# Altium PCB PCB_23GXSTM32F103Ext2.1ACTION_2026-02-23.pcbdoc (part 2 of 2)
Units mil, origin at the board's own origin, x right, y up, seen from the top; angles counter-clockwise.
Board outline 5147 x 5265.55 mil, 2 copper layers (Top Layer, Bottom Layer); 51 components, 82 nets, 368 pads, 74 vias.
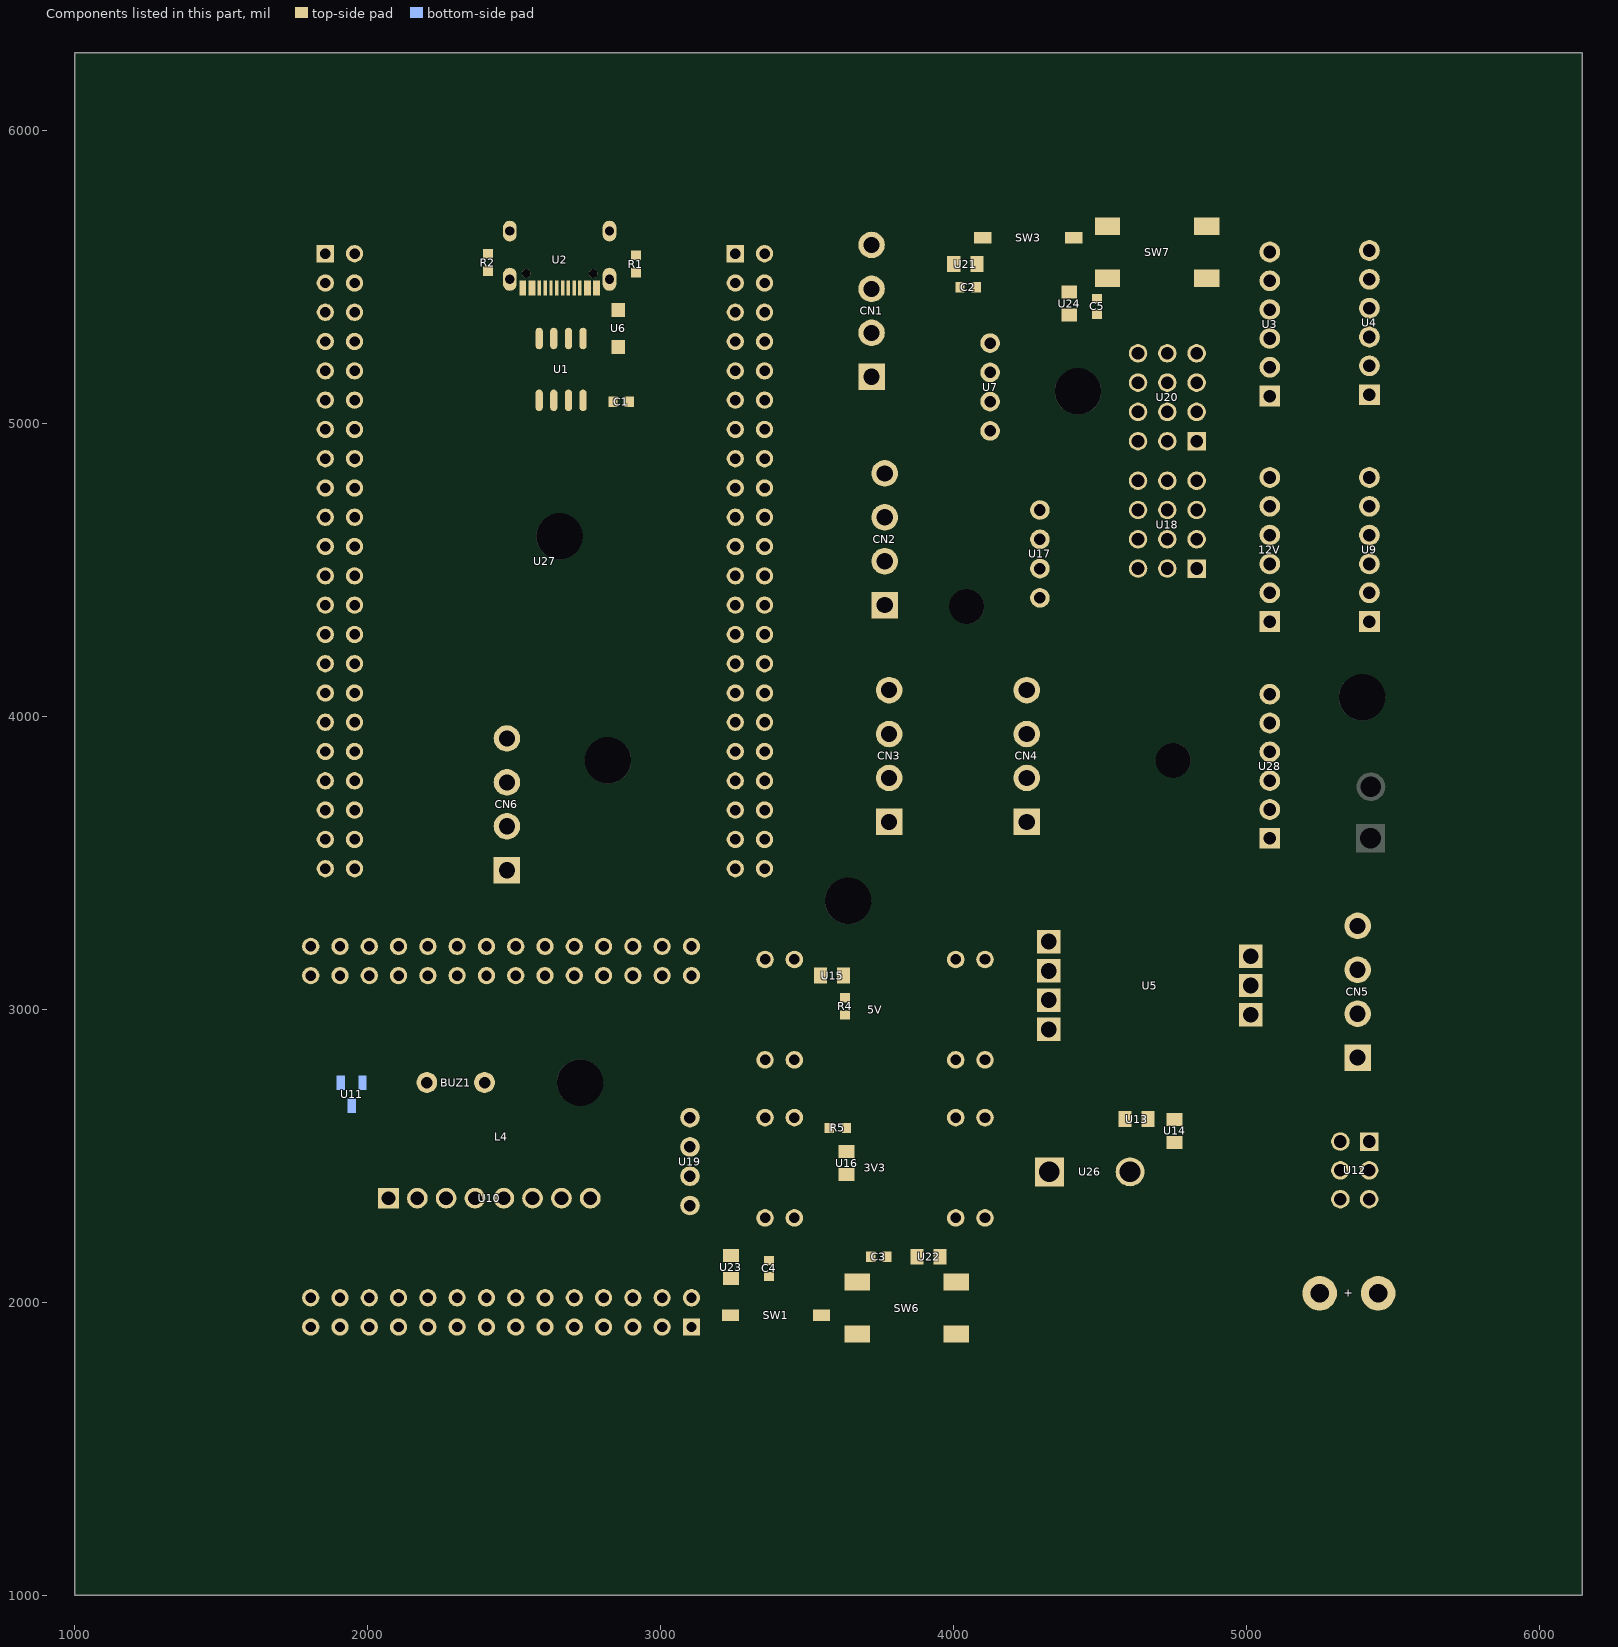
[diagram p2: the components of this part, seen from the top]

## Other copper
Top Layer:
  region net RX3: 2647.4,5103.7 2622.6,5103.7 2630,5118.7 2640,5118.7
  region net TX3: 2697.4,5055.08 2672.6,5055.08 2680,5040.08 2690,5040.08
  region net V3: 2747.4,5087.5 2747.4,5062.5 2762.4,5070 2762.4,5080
  region net D-: 2697.4,5314.92 2672.6,5314.92 2680,5329.92 2690,5329.92
  region net D+: 2747.4,5314.92 2722.6,5314.92 2730,5329.92 2740,5329.92
  region net 5V: 2597.4,5103.7 2572.6,5103.7 2580,5118.7 2590,5118.7
  region net 5V: 2572.6,5055.08 2572.6,5103.7 2535.1,5091.9 2535.1,5066.9
  region net 12V: 5374.62,3534.69 5374.62,3633.09 5299.62,3608.9 5299.62,3558.9
  region net 12V: 5473.02,3633.09 5473.02,3534.69 5548.02,3558.9 5548.02,3608.9
  region net 5V: 5334.7,2803.75 5334.7,2866.25 5297.2,2847.5 5297.2,2822.5
  region net 12V: 5044.54,5058.46 5044.54,5129.33 5021.1,5118.9 5021.1,5068.9
  region net 12V: 5115.41,5129.33 5115.41,5058.46 5190.41,5073.9 5190.41,5123.9
  region net 12V: 5384.54,5063.46 5384.54,5134.33 5309.54,5123.9 5309.54,5073.9
  region net 12V: 5044.54,4288.46 5044.54,4359.33 5036.1,4348.9 5036.1,4298.9
  region net 12V: 5115.41,4359.33 5115.41,4288.46 5190.41,4298.9 5190.41,4348.9
  region net 12V: 5455.41,4359.33 5455.41,4288.46 5530.41,4298.9 5530.41,4348.9
  region net 12V: 5384.54,4288.46 5384.54,4359.33 5309.54,4348.9 5309.54,4298.9
  region net OPG: 5055,2996.31 5055,2966.29 5073.01,2975.29 5073.01,2987.3
  region net OPTX: 5055,3096.31 5055,3066.29 5073.01,3075.29 5073.01,3087.3
  region net OPRX: 5055,3196.31 5055,3166.29 5073.01,3175.29 5073.01,3187.3
  region net 5V: 4365,3262.55 4365,3200.05 4383.7,3218.8 4383.7,3243.8
  region net CC2: 2427.01,5567.2 2427.01,5592.2 2442.01,5584.7 2442.01,5574.7
  region net CC1: 2897.99,5587.2 2897.99,5562.2 2882.99,5569.7 2882.99,5579.7
  region net 3V3: 3587.8,2612.01 3562.8,2612.01 3570.3,2614.7 3580.3,2614.7
  region net M3V3: 3647.26,2577.99 3622.26,2577.99 3629.82,2562.99 3639.82,2562.99
  region net M3V3: 3622.2,2612.01 3647.2,2612.01 3639.7,2627.01 3629.7,2627.01
  region net M5V: 3642.5,3055.53 3617.5,3055.53 3625,3070.53 3635,3070.53
  region net M5V: 3647.01,3027.2 3647.01,3052.2 3662.01,3044.7 3662.01,3034.7
  region net M5V: 3612.99,3052.2 3612.99,3027.2 3597.99,3034.7 3597.99,3044.7
  region net M3V3: 3647.42,2536.66 3622.42,2536.66 3629.86,2551.66 3639.86,2551.66
  region net M3V3: 3662.1,2501.9 3662.1,2526.9 3677.1,2519.4 3677.1,2509.4
  region net 5V: 3558.1,3142.11 3533.1,3142.11 3540.6,3154.4 3550.6,3154.4
  region net M5V: 3642.5,3087.89 3617.5,3087.89 3625,3072.89 3635,3072.89
  region net M12V: 4727.9,2636.9 4727.9,2611.9 4712.9,2619.4 4712.9,2629.4
  region net M12V: 4782.1,2611.9 4782.1,2636.9 4797.1,2629.4 4797.1,2619.4
  region net 12V: 4563.34,2637.5 4563.34,2612.5 4548.34,2620 4548.34,2630
  region net M12V: 4686.66,2636.9 4686.66,2611.9 4701.66,2619.4 4701.66,2629.4
  region net PC5V: 2560.51,5437 2548.7,5437 2549.6,5422 2559.6,5422
  region net PC5V: 2572.32,5437.01 2560.51,5437.01 2561.4,5422.01 2571.4,5422.01
  region net PC5V: 2749.49,5437 2737.68,5437 2738.6,5422 2748.6,5422
  region net PC5V: 2761.3,5437.01 2749.49,5437.01 2750.4,5422.01 2760.4,5422.01
  region net CC2: 2580.2,5488.18 2592.01,5488.18 2591.1,5503.18 2581.1,5503.18
  region net D+: 2619.57,5488.18 2631.38,5488.18 2630.5,5503.18 2620.5,5503.18
  region net D-: 2651.06,5437 2639.25,5437 2640.2,5422 2650.2,5422
  region net D+: 2658.94,5488.18 2670.75,5488.18 2669.8,5503.18 2659.8,5503.18
  region net D+: 2670.75,5437 2658.94,5437 2659.8,5422 2669.8,5422
  region net D-: 2690.43,5437 2678.62,5437 2679.5,5422 2689.5,5422
  region net CC1: 2698.31,5488.18 2710.12,5488.18 2709.2,5503.18 2699.2,5503.18
  region net 5V: 2035.08,2342.5 2035.08,2367.5 2020.08,2360 2020.08,2350
  region net V3: 2821.69,5062.5 2821.69,5087.5 2806.69,5080 2806.69,5070
  region net 3V3VDE1: 4417.69,5654.69 4440.04,5654.69 4452.27,5669.69 4438.12,5669.69
  region net 3V3VDE1: 4380.99,5654.69 4402.81,5654.69 4382.39,5669.69 4368.24,5669.69
  region net S$51075: 4092.3,5615.31 4086.44,5614.88 4085.14,5615.31 4069.96,5615.31 4075.83,5618.42 4085.14,5615.31 4092.3,5615.31
  region net S$50933: 4472.29,5431.12 4494.12,5443.31 4474.9,5449.76 4465.83,5444.7
  region net S$50933: 4477.5,5443.31 4502.5,5443.31 4495,5458.31 4485,5458.31
  region net C4: 4367.9,5383.1 4367.9,5358.1 4352.9,5365.6 4352.9,5375.6
  region net S$50933: 4422.1,5461.9 4422.1,5436.9 4437.1,5444.4 4437.1,5454.4
  region net S$51055: 3352.29,2071.69 3352.29,2093.1 3337.29,2085.6 3337.29,2075.6
  region net C1: 3252.5,2181.66 3227.5,2181.66 3235,2196.66 3245,2196.66
  region net S$51055: 3252.5,2058.34 3227.5,2058.34 3235,2043.34 3245,2043.34
  region net S$51055: 3267.1,2093.1 3267.1,2068.1 3282.1,2075.6 3282.1,2085.6
  region net S$51065: 3785.1,2137.28 3760.1,2137.28 3767.6,2122.28 3777.6,2122.28
  region net S$51065: 3788.31,2167.5 3788.31,2142.5 3803.31,2150 3803.31,2160
  region net C0: 3966.9,2182.11 3941.9,2182.11 3949.4,2197.11 3959.4,2197.11
  region net S$51065: 3853.34,2142.5 3853.34,2167.5 3838.34,2160 3838.34,2150
  region net S$51075: 4065.06,5482.72 4090.06,5482.72 4082.56,5497.72 4072.56,5497.72
  region net C5: 3978.34,5547.5 3978.34,5522.5 3963.34,5530 3963.34,5540
  region net S$51075: 4066.87,5572.11 4091.87,5572.11 4084.37,5587.11 4074.37,5587.11
  region net S$51075: 4090.06,5517.89 4065.06,5517.89 4072.56,5502.89 4082.56,5502.89
  region net 3V3: 3578.75,1935.1 3556.4,1935.1 3576.83,1920.1 3590.97,1920.1
  region net 3V3: 3519.7,1974.47 3578.75,1974.47 3561.7,2011.97 3536.7,2011.97
  region net 3V3: 3519.7,1935.1 3519.7,1974.47 3482.2,1967.3 3482.2,1942.3
  region net S$51055: 3227.5,1974.47 3252.5,1974.47 3245,1989.47 3235,1989.47
  region net 5V: 2867.5,5238.39 2842.5,5238.39 2850,5223.39 2860,5223.39
  region net PC5V: 2831.38,5375.5 2831.38,5400.5 2816.38,5393 2816.38,5383
  region net 12V: 4278,2494.2 4376.4,2494.2 4352.2,2557.8 4302.2,2557.8
  region net 12V: 4376.4,2457.5 4376.4,2432.5 4391.4,2440 4391.4,2450
  region net 5V: 1884.32,5609.74 1884.32,5550.68 1921.82,5567.7 1921.82,5592.7
  region net 12V: 5115.41,3619.33 5115.41,3548.46 5190.41,3558.9 5190.41,3608.9
  region net 12V: 5115.41,3548.46 5044.54,3548.46 5055,3473.46 5105,3473.46
  region net 3V3: 3627.4,1878.9 3627.4,1903.9 3612.6,1896.4 3612.6,1886.4
  region net S$51065: 3714.01,2081.1 3714.01,2056.1 3729.01,2063.6 3729.01,2073.6
  region net 3V3VDE1: 4482.4,5661.1 4482.4,5686.1 4467.4,5678.6 4467.4,5668.6
  region net S$50933: 4508.69,5466.89 4483.69,5466.89 4486.46,5464.24 4497.07,5460.7
  region net TX1: 2050.24,3307.71 2037.29,3294.76 2046.27,3291.66 2053.34,3298.73
  region net TX1: 2038.82,3319.12 2025.88,3306.18 2022.77,3315.15 2029.85,3322.23
  region net RX1: 2012.18,3295.76 1999.24,3282.82 2008.21,3279.71 2015.29,3286.79
  region net RX1: 1990.85,3303.07 2009.15,3303.07 2005,3311.62 1995,3311.62
  region net C13: 4569.56,4066.96 4569.56,4085.26 4561.02,4081.11 4561.02,4071.11
  region net E3: 3561.93,3545.85 3561.93,3564.15 3553.38,3560 3553.38,3550
  region net E2: 3516.93,3520.85 3516.93,3539.15 3510,3535 3510,3525
  region net C13: 4340.85,3878.07 4359.15,3878.07 4355,3886.62 4345,3886.62
  region net D15: 4536,3532.06 4554,3532.06 4550,3523.66 4540,3523.66
  region net D14: 4496,3532.06 4514,3532.06 4510,3523.66 4500,3523.66
  region net D13: 4456,3532.06 4474,3532.06 4470,3523.66 4460,3523.66
  region net D12: 4413.14,3538.14 4428.33,3528.47 4420.54,3523.47 4411.9,3528.97
  region net SDA1: 3047.06,4266 3047.06,4284 3038.66,4280 3038.66,4270
  region net SDA1: 2996,4037.94 3014,4037.94 3010,4046.34 3000,4046.34
  region net SCL1: 3031,4007.94 3049,4007.94 3045,4016.34 3035,4016.34
  region net SCL1: 3476,4282.06 3494,4282.06 3490,4273.66 3480,4273.66
  region net C4: 3421,5277.94 3439,5277.94 3435,5286.34 3425,5286.34
  region net RX4: 3189.14,4500.47 3206.12,4494.51 3205.65,4503.58 3195.18,4507.25
  region net TX4: 3186,4547.94 3204,4547.94 3200,4556.34 3190,4556.34
  region net SCL3: 3582.06,5086 3582.06,5104 3573.66,5100 3573.66,5090
  region net SDA3: 3582.06,5121 3582.06,5139 3573.66,5135 3573.66,5125
  region net C5: 3176.14,4390.31 3159,4384.8 3160,4393.95 3170,4397.16
  region net C5: 3177.94,4371 3177.94,4389 3186.34,4385 3186.34,4375
  region net C5: 3170.75,4368.02 3158.02,4380.75 3154.91,4371.98 3161.98,4364.91
  region net M5V: 3266,2272.94 3284,2272.94 3280,2281.34 3270,2281.34
  region net M3V3: 3301,2237.94 3319,2237.94 3315,2246.34 3305,2246.34
  region net C0: 3206.98,2970.75 3194.25,2958.02 3203.02,2954.91 3210.09,2961.98
  region net C1: 3146.98,2985.75 3134.25,2973.02 3143.02,2969.91 3150.09,2976.98
  region net C0: 3277.06,2936 3277.06,2954 3268.66,2950 3268.66,2940
  region net C0: 3607.94,2261 3607.94,2279 3616.34,2275 3616.34,2265
  region net E4: 4956,4272.06 4974,4272.06 4970,4263.66 4960,4263.66
  region net E5: 4926,4272.06 4944,4272.06 4940,4263.66 4930,4263.66
  region net E6: 4886,4272.06 4904,4272.06 4900,4263.66 4890,4263.66
  region net RX1: 3796,3102.94 3814,3102.94 3810,3111.34 3800,3111.34
  region net TX1: 3821,3077.94 3839,3077.94 3835,3086.34 3825,3086.34
  region net TNSS: 3161,3202.06 3179,3202.06 3175,3193.66 3165,3193.66
  region net TSCK: 3046,3242.06 3064,3242.06 3060,3233.66 3050,3233.66
  region net TMISO: 2946,3242.06 2964,3242.06 2960,3233.66 2950,3233.66
  region net TMOSI: 2846,3242.06 2864,3242.06 2860,3233.66 2850,3233.66
  region net TMISO: 2982.06,2111 2982.06,2129 2973.66,2125 2973.66,2115
  region net TSCK: 2992.06,2186 2992.06,2204 2983.66,2200 2983.66,2190
  region net TNSS: 2991,2232.94 3009,2232.94 3005,2241.34 2995,2241.34
  region net TMOSI: 2867.94,2111 2867.94,2129 2875,2125 2875,2115
  region net TMOSI: 2851,2027.06 2869,2027.06 2865,2018.66 2855,2018.66
  region net M12V: 3472.94,1836 3472.94,1854 3481.34,1850 3481.34,1840
  region net C4: 2647.94,4321 2647.94,4339 2656.34,4335 2656.34,4325
  region net C5: 2637.94,4351 2637.94,4369 2646.34,4365 2646.34,4355
  region net C0: 2285.31,3523.86 2279.8,3541 2288.95,3540 2292.16,3530
  region net C1: 2215.31,3571.14 2209.8,3554 2218.95,3555 2222.16,3565
  region net C5: 3156,5177.94 3174,5177.94 3170,5186.34 3160,5186.34
  region net C5: 3156,4952.06 3174,4952.06 3170,4943.66 3160,4943.66
  region net SCL3: 3217.94,4821 3217.94,4839 3226.34,4835 3226.34,4825
  region net SDA3: 3207.94,4916 3207.94,4934 3216.34,4930 3216.34,4920
  region net PC5V: 2738.61,5403.78 2755.17,5410.83 2748.6,5417.16 2738.6,5412.9
  region net PC5V: 2744.13,5410.47 2761.12,5404.52 2760.4,5413.67 2750.4,5417.17
  region net PC5V: 2761.98,5400.75 2749.25,5388.02 2758.02,5384.91 2765.09,5391.98
  region net PC5V: 2565.75,5421.98 2553.02,5409.25 2551.06,5416.86 2558.14,5423.94
  region net PC5V: 2574.65,5417.14 2556.71,5418.68 2561.4,5426.71 2571.4,5425.85
  region net L4NSS1: 2036,2702.06 2054,2702.06 2050,2693.66 2040,2693.66
  region net D-: 2633.99,5415.39 2651.06,5409.66 2650.2,5418.81 2640.2,5422.17
  region net D-: 2631,5397.06 2649,5397.06 2645,5388.66 2635,5388.66
  region net D-: 2695.75,5416.98 2683.02,5404.25 2680.97,5411.97 2688.04,5419.04
  region net B14: 4647.27,5266.34 4601.71,5253.84 4613.1,5279.83 4624.2,5282.87
  region net 5V: 4753.62,5260.83 4706.38,5260.83 4717.5,5282.88 4742.5,5282.88
  region net 5V: 4753.62,5219.17 4706.38,5219.17 4717.5,5197.12 4742.5,5197.12
  region net B13: 4598.57,5138.03 4631.97,5171.43 4603.21,5173.86 4596.14,5166.79
  region net 5V: 4753.62,5119.17 4706.38,5119.17 4717.5,5097.12 4742.5,5097.12
  region net 5V: 4753.62,5160.83 4706.38,5160.83 4717.5,5182.88 4742.5,5182.88
  region net B0: 4598.57,5041.97 4631.97,5008.57 4603.54,5006.46 4596.46,5013.54
  region net 5V: 4753.62,5019.17 4706.38,5019.17 4717.5,4997.12 4742.5,4997.12
  region net 5V: 4753.62,5060.83 4706.38,5060.83 4717.5,5082.88 4742.5,5082.88
  region net B1: 4612.06,4914.11 4606.56,4961.03 4586.83,4940 4588,4930
  region net 5V: 4753.62,4919.17 4706.38,4919.17 4717.5,4897.12 4742.5,4897.12
  region net 5V: 4753.62,4960.83 4706.38,4960.83 4717.5,4982.88 4742.5,4982.88
  region net L4SDA1: 3080.75,2602.62 3075.24,2652.52 3054.16,2630 3055.27,2620
  region net L4SCL1: 3077.87,2504.9 3077.87,2555.1 3060,2535 3060,2525
  region net 5V: 4753.62,4784.17 4706.38,4784.17 4717.5,4762.12 4742.5,4762.12
  region net 5V: 4753.62,4825.83 4706.38,4825.83 4717.5,4847.88 4742.5,4847.88
  region net 5V: 4753.62,4684.17 4706.38,4684.17 4717.5,4662.12 4742.5,4662.12
  region net 5V: 4753.62,4725.83 4706.38,4725.83 4717.5,4747.88 4742.5,4747.88
  region net 5V: 4753.62,4584.17 4706.38,4584.17 4717.5,4562.12 4742.5,4562.12
  region net 5V: 4753.62,4625.83 4706.38,4625.83 4717.5,4647.88 4742.5,4647.88
  region net 5V: 4753.62,4525.83 4706.38,4525.83 4717.5,4547.88 4742.5,4547.88
  region net 5V: 4753.62,4484.17 4706.38,4484.17 4717.5,4462.12 4742.5,4462.12
  region net OPRX: 5350.05,3251.04 5350.05,3318.96 5320,3291 5320,3279
  region net OPTX: 5352.91,3098.73 5347.4,3166.42 5318.07,3136 5319.05,3124
  region net OPG: 5352.15,2949.31 5348.07,3017.1 5318.11,2987.3 5318.83,2975.29
  region net 5V: 4220.05,3756.04 4220.05,3823.96 4188.36,3802.5 4188.36,3777.5
  region net 5V: 3809.95,3756.04 3809.95,3823.96 3841.64,3802.5 3841.64,3777.5
  region net 5V: 3750.05,3756.04 3750.05,3823.96 3718.36,3802.5 3718.36,3777.5
  region net TX4: 3735.05,4796.04 3735.05,4863.96 3710,4835 3710,4825
  region net RX4: 3735.05,4646.04 3735.05,4713.96 3703.36,4685 3703.36,4675
  region net 5V: 3735.05,4496.04 3735.05,4563.96 3703.36,4542.5 3703.36,4517.5
  region net 5V: 3794.95,4496.04 3794.95,4563.96 3826.64,4542.5 3826.64,4517.5
  region net 5V: 3749.95,5276.04 3749.95,5343.96 3781.64,5322.5 3781.64,5297.5
  region net 12VI: 5210.94,1985.71 5210.94,2074.29 5169.6,2055 5169.6,2005
  region net 5V: 4147.13,5049.9 4147.13,5100.1 4170.56,5087.5 4170.56,5062.5
  region net 5V: 4102.87,5049.9 4102.87,5100.1 4079.44,5087.5 4079.44,5062.5
  region net M3V3: 5303.82,2325.03 5296.59,2371.72 5277.64,2350 5279.19,2340
  region net M5V: 5299.96,2426.38 5299.96,2473.62 5277.91,2455 5277.91,2445
  region net M12V: 5342.56,2525.66 5340.66,2572.86 5359.8,2555 5360.2,2545
  region net M12V: 5299.33,2571.47 5346.34,2566.83 5330,2590.6 5320,2591.59
  region net L4NSS1: 2636.49,2329.47 2689.46,2333.81 2670,2307.33 2660,2306.51
  region net DRDY: 2589.22,2378.44 2536.07,2378.44 2557.64,2403.24 2567.64,2403.24
  region net L4MISO1: 2490.78,2331.56 2437.63,2331.57 2459.2,2306.76 2469.2,2306.76
  region net L4MOSI1: 2392.15,2378.68 2339,2378.19 2360.35,2403.19 2370.35,2403.28
  region net L4SCK1: 2242.11,2330.14 2295.18,2333.05 2275,2307.11 2265,2306.56
  region net 5V: 4317.13,4479.9 4317.13,4530.1 4340.56,4517.5 4340.56,4492.5
  region net 5V: 4272.87,4479.9 4272.87,4530.1 4249.44,4517.5 4249.44,4492.5
  region net 12V: 4127.34,2652.66 4127.3,2607.66 4148.3,2605.14 4148.35,2655.14
  region net 12V: 4087.65,2652.69 4087.63,2607.69 4066.63,2605.2 4066.65,2655.2
  region net 12V: 4027.33,2607.7 4027.32,2652.7 4048.32,2655.2 4048.33,2605.2
  region net 12V: 3987.64,2652.7 3987.63,2607.7 3966.63,2605.2 3966.64,2655.2
  region net 3V3: 3436.46,2652.7 3436.45,2607.7 3415.45,2617.7 3415.46,2642.7
  region net 3V3: 3476.15,2607.7 3476.14,2652.7 3497.14,2635.2 3497.14,2625.2
  region net 3V3: 3478.8,2610.35 3433.8,2610.35 3443.8,2589.35 3468.8,2589.35
  region net 3V3: 3376.14,2607.7 3376.14,2652.7 3397.14,2642.7 3397.14,2617.7
  region net 12V: 4127.33,3147.69 4127.31,3192.69 4148.31,3195.2 4148.34,3145.2
  region net 12V: 4087.64,3192.69 4087.63,3147.69 4066.63,3145.19 4066.64,3195.19
  region net 12V: 3987.72,3147.62 3987.56,3192.62 3966.55,3195.04 3966.73,3145.04
  region net 12V: 4027.32,3147.69 4027.32,3192.69 4048.32,3195.19 4048.32,3145.19
  region net 5V: 3436.46,3192.7 3436.45,3147.7 3415.45,3157.7 3415.46,3182.7
  region net 5V: 3476.15,3147.7 3476.14,3192.7 3497.14,3175.2 3497.14,3165.2
  region net 5V: 3376.14,3147.7 3376.14,3192.7 3397.14,3182.7 3397.14,3157.7
  region net 12VI: 4566.98,2411.25 4640.76,2413.68 4630,2378.86 4580,2377.21
  region net E2: 3374.32,3458.06 3374.32,3502.36 3394.99,3485.21 3394.99,3475.21
  region net E3: 3283.09,3488.62 3242.9,3507.24 3266.85,3518.93 3276.52,3514.45
  region net E4: 3374.32,3558.06 3374.32,3602.36 3394.99,3585.21 3394.99,3575.21
  region net E5: 3283.75,3585.98 3245.45,3608.22 3270.5,3617.57 3279.45,3612.38
  region net E6: 3374.32,3658.06 3374.32,3702.36 3394.99,3685.21 3394.99,3675.21
  region net C0: 3335.36,3757.97 3379.28,3763.71 3365,3741 3355,3739.7
  region net C1: 3238.29,3755.72 3232.55,3799.64 3214.28,3780 3215.58,3770
  region net C4: 3377.04,4360.8 3332.75,4360.56 3350,4339.98 3360,4340.04
  region net C5: 3235.38,4357.96 3235.14,4402.25 3214.56,4385 3214.62,4375
  region net B0: 3382.16,4491.28 3340.38,4505.98 3362.9,4519.97 3373.36,4516.29
  region net B1: 3283.03,4471.57 3242.69,4453.27 3266.53,4441.39 3276.26,4445.81
  region net TX3: 3235.38,4957.96 3235.14,5002.25 3214.56,4985 3214.62,4975
  region net RX3: 3377.02,5099.64 3332.73,5099.84 3349.97,5120.43 3359.97,5120.39
  region net B13: 3374.32,5158.06 3374.32,5202.36 3394.99,5185.21 3394.99,5175.21
  region net B14: 3252.94,5209.68 3284.26,5178.36 3286.75,5205.1 3279.68,5212.17
  region net 3V3VDE1: 3376.98,5599.69 3332.69,5599.8 3349.89,5620.42 3359.89,5620.4
  region net TX1: 1983.47,4587.21 1958.15,4550.87 1984.87,4553.06 1990.68,4561.39
  region net RX1: 1882.07,4568.91 1840.17,4554.56 1862.55,4540.38 1873.09,4543.98
  region net D15: 1974.32,4858.06 1974.32,4902.36 1994.99,4885.21 1994.99,4875.21
  region net D13: 1981.73,4992.31 1963.43,4951.97 1989.19,4958.74 1993.61,4968.47
  region net D14: 1883.03,4971.57 1842.69,4953.27 1866.53,4941.39 1876.26,4945.81
  region net D12: 1884.13,5076.85 1847.79,5051.53 1873.61,5044.32 1881.94,5050.13
  region net 3V3: 1935.26,5458.06 1935.26,5502.36 1914.59,5492.71 1914.59,5467.71
  region net 3V3: 1835.32,5458.01 1835.19,5502.3 1814.55,5492.59 1814.63,5467.59
  region net 3V3: 1874.32,5458.06 1874.32,5502.36 1894.99,5492.71 1894.99,5467.71
  region net 5V: 1974.38,5602.31 1974.27,5558.02 1994.96,5567.61 1995.02,5592.61
  region net 5V: 1935.26,5558.06 1935.25,5602.35 1914.59,5592.7 1914.59,5567.7
  region net 5V: 1827.15,2034.53 1782.85,2034.53 1800,2055.2 1810,2055.2
  region net 3V3: 1875.53,2016.85 1906.85,1985.53 1885.41,1977.74 1867.74,1995.41
  region net 3V3: 1927.91,2033.63 1920.62,1989.94 1932.92,1997.5 1937.08,2022.5
  region net L4SCK1: 2027.15,2034.53 1982.85,2034.53 2000,2055.2 2010,2055.2
  region net L4SDA1: 2624.53,1892.85 2624.53,1937.15 2635,1920 2635,1910
  region net L4SCL1: 2727.15,2034.53 2682.85,2034.53 2700,2045 2710,2045
  region net TMOSI: 2885.47,1892.85 2885.47,1937.15 2875,1920 2875,1910
  region net L4MISO1: 1931.94,3227.1 1913.64,3186.76 1939.4,3193.53 1943.82,3203.26
  region net L4MOSI1: 2027.15,3095.47 1982.85,3095.47 2000,3074.8 2010,3074.8
  region net DRDY: 2024.53,3192.85 2024.53,3237.15 2040,3220 2040,3210
Mid-Layer 2:
  region net C5: 2127.15,3234.53 2082.85,3234.53 2100,3255.2 2110,3255.2
  region net C4: 2124.53,3092.85 2124.53,3137.15 2140,3120 2140,3110
  region net TNSS: 3127.15,2034.53 3082.85,2034.53 3100,2055.2 3110,2055.2
  region net TSCK: 3030.65,1900.38 3016.3,1942.28 3041.23,1933.3 3044.83,1922.76
  region net TMISO: 3027.15,2034.53 2982.85,2034.53 3000,2055.2 3010,2055.2
  region net M12V: 2227.15,1895.47 2182.85,1895.47 2200,1874.8 2210,1874.8
  region net SCL1: 4272.87,4579.9 4272.87,4630.1 4249.44,4610 4249.44,4600
  region net SDA1: 4272.87,4679.9 4272.87,4730.1 4249.44,4710 4249.44,4700
  region net SCL3: 4119.26,5207.97 4093.01,5165.19 4083.48,5194.45 4088.86,5203.21
  region net SDA3: 4102.87,5249.9 4102.87,5300.1 4079.44,5280 4079.44,5270
  region net D15: 4609.17,4481.38 4609.17,4528.62 4587.12,4510 4587.12,4500
  region net D14: 4609.17,4581.38 4609.17,4628.62 4587.12,4610 4587.12,4600
  region net D13: 4609.17,4681.38 4609.17,4728.62 4587.12,4710 4587.12,4700
  region net D12: 4609.17,4781.38 4609.17,4828.62 4587.12,4810 4587.12,4800
  region net TX5: 3087.94,4116 3087.94,4134 3096.34,4130 3096.34,4120
  region net RX5: 3087.94,4071 3087.94,4089 3096.34,4085 3096.34,4075
  region net TX5: 3529.1,4056 3529.1,4074 3520.7,4070 3520.7,4060
  region net RX5: 3528.36,4021 3528.36,4039 3519.96,4035 3519.96,4025
  region net C5: 2622.06,4351 2622.06,4369 2613.66,4365 2613.66,4355
  region net C4: 2632.06,4321 2632.06,4339 2623.66,4335 2623.66,4325
  region net M12V: 3457.06,1836 3457.06,1854 3448.66,1850 3448.66,1840
  region net TMOSI: 2851,2042.94 2869,2042.94 2865,2051.34 2855,2051.34
  region net TMOSI: 2851,2112.06 2869,2112.06 2865,2103.66 2855,2103.66
  region net TNSS: 3007.94,2216 3007.94,2234 3016.34,2230 3016.34,2220
  region net TSCK: 3007.94,2186 3007.94,2204 3016.34,2200 3016.34,2190
  region net TMISO: 3001.98,2120.75 2989.25,2108.02 2998.02,2104.91 3005.09,2111.98
  region net M3V3: 3302.06,2221 3302.06,2239 3293.66,2235 3293.66,2225
  region net M5V: 3267.06,2256 3267.06,2274 3258.66,2270 3258.66,2260
  region net M5V: 3192.94,2256 3192.94,2274 3201.34,2270 3201.34,2260
  region net M3V3: 3202.94,2221 3202.94,2239 3211.34,2235 3211.34,2225
  region net SDA3: 3581,5137.94 3599,5137.94 3595,5146.34 3585,5146.34
  region net SCL3: 3597.94,5086 3597.94,5104 3605,5100 3605,5090
  region net C4: 3421,4542.94 3439,4542.94 3435,4551.34 3425,4551.34
  region net C4: 3421,5262.06 3439,5262.06 3435,5253.66 3425,5253.66
  region net SDA1: 3476,4377.94 3494,4377.94 3490,4386.34 3480,4386.34
  region net SCL1: 3492.94,4281 3492.94,4299 3501.34,4295 3501.34,4285
  region net D12: 4416,4137.94 4434,4137.94 4430,4146.34 4420,4146.34
  region net D13: 4456,4137.94 4474,4137.94 4470,4146.34 4460,4146.34
  region net D14: 4496,4137.94 4514,4137.94 4510,4146.34 4500,4146.34
  region net D15: 4536,4137.94 4554,4137.94 4550,4146.34 4540,4146.34
  region net E3: 4110.85,3433.07 4129.15,3433.07 4125,3441.62 4115,3441.62
  region net E2: 4098.07,3385.85 4098.07,3404.15 4106.62,3400 4106.62,3390
  region net E3: 4575.85,3666.93 4594.15,3666.93 4590,3658.38 4580,3658.38
  region net E2: 4620.76,3662.82 4607.82,3675.76 4606.46,3668.54 4613.54,3661.46
Bottom Layer:
  region net TX1: 4285,2918.8 4285,2943.8 4270,2936.3 4270,2926.3
  region net RX1: 4285,3018.8 4285,3043.8 4270,3036.3 4270,3026.3
  region net 5V: 4293.75,3271.26 4356.25,3271.26 4337.5,3308.76 4312.5,3308.76
  region net 5V: 1825.26,5550.68 1825.26,5609.74 1787.76,5592.7 1787.76,5567.7
  region net 5V: 2490.01,3429.7 2459.99,3429.7 2469,3415 2481,3415
  region net 3V3: 1932.5,2646.02 1957.5,2646.02 1950,2631.02 1940,2631.02
  region net BUZSWT: 1996.18,2736.9 1996.18,2761.9 2011.18,2754.4 2011.18,2744.4
  region net G: 1920.1,2773.98 1895.1,2773.98 1902.6,2788.98 1912.6,2788.98
  region net TX1: 2046.13,3297.79 2046.13,3316.09 2054.68,3312.94 2054.68,3300.94
  region net RX1: 1994.12,3284.3 2011.35,3290.51 2010.83,3281.24 2000.43,3277.49
  region net C13: 4585.7,4066.96 4585.7,4085.26 4594.25,4081.11 4594.25,4071.11
  region net E2: 4628.07,3665.85 4628.07,3684.15 4636.62,3680 4636.62,3670
  region net E3: 4575.85,3683.07 4594.15,3683.07 4590,3691.62 4580,3691.62
  region net E2: 4080.85,3403.07 4099.15,3403.07 4095,3411.62 4085,3411.62
  region net E3: 4110.85,3433.07 4129.15,3433.07 4125,3441.62 4115,3441.62
  region net E3: 3578.07,3545.85 3578.07,3564.15 3586.62,3560 3586.62,3550
  region net E2: 3533.07,3520.85 3533.07,3539.15 3541.62,3535 3541.62,3525
  region net C13: 4341.93,3860.85 4341.93,3879.15 4333.38,3875 4333.38,3865
  region net D15: 4536,4122.06 4554,4122.06 4550,4113.66 4540,4113.66
  region net D14: 4496,4122.06 4514,4122.06 4510,4113.66 4500,4113.66
  region net D13: 4456,4122.06 4474,4122.06 4470,4113.66 4460,4113.66
  region net D12: 4416,4122.06 4434,4122.06 4430,4113.66 4420,4113.66
  region net D15: 4536,3547.94 4554,3547.94 4550,3556.34 4540,3556.34
  region net D14: 4496,3547.94 4514,3547.94 4510,3556.34 4500,3556.34
  region net D13: 4456,3547.94 4474,3547.94 4470,3556.34 4460,3556.34
  region net D12: 4416,3547.94 4434,3547.94 4430,3556.34 4420,3556.34
  region net SDA1: 3066.98,4274.25 3054.25,4286.98 3063.02,4290.09 3070.09,4283.02
  region net SDA1: 2997.06,4021 2997.06,4039 2988.66,4035 2988.66,4025
  region net SCL1: 3032.06,3991 3032.06,4009 3023.66,4005 3023.66,3995
  region net SDA1: 3490.86,4359.53 3473.88,4365.49 3474.35,4356.42 3484.82,4352.75
  region net C4: 3421,4527.06 3439,4527.06 3435,4518.66 3425,4518.66
  region net RX4: 3195.75,4478.02 3183.02,4490.75 3179.91,4481.98 3186.98,4474.91
  region net TX4: 3195.75,4528.02 3183.02,4540.75 3179.91,4531.98 3186.98,4524.91
  region net M3V3: 3186,2222.06 3204,2222.06 3200,2213.66 3190,2213.66
  region net M5V: 3177.06,2256 3177.06,2274 3170,2270 3170,2260
  region net C0: 3193.14,2981.86 3183.47,2966.67 3178.47,2974.46 3183.97,2983.1
  region net C1: 3127.06,2976 3127.06,2994 3118.66,2990 3118.66,2980
  region net C0: 3276,2937.06 3294,2937.06 3290,2928.66 3280,2928.66
  region net C0: 3592.06,2261 3592.06,2279 3583.66,2275 3583.66,2265
  region net E4: 4972.94,4271 4972.94,4289 4981.34,4285 4981.34,4275
  region net E5: 4929.14,4290.47 4946.12,4284.51 4945.65,4293.58 4935.18,4297.25
  region net E6: 4886,4287.94 4904,4287.94 4900,4296.34 4890,4296.34
  region net RX1: 3812.94,3086 3812.94,3104 3821.34,3100 3821.34,3090
  region net TX1: 3837.94,3061 3837.94,3079 3846.34,3075 3846.34,3065
  region net TNSS: 3181.98,3209.25 3169.25,3221.98 3178.02,3225.09 3185.09,3218.02
  region net TSCK: 3066.98,3249.25 3054.25,3261.98 3063.02,3265.09 3070.09,3258.02
  region net TMISO: 2966.98,3249.25 2954.25,3261.98 2963.02,3265.09 2970.09,3258.02
  region net TMOSI: 2866.98,3249.25 2854.25,3261.98 2863.02,3265.09 2870.09,3258.02
  region net C0: 2275.75,3518.02 2263.02,3530.75 2259.91,3521.98 2266.98,3514.91
  region net C1: 2196,3557.06 2214,3557.06 2210,3548.66 2200,3548.66
  region net C5: 3156,5162.06 3174,5162.06 3170,5153.66 3160,5153.66
  region net C5: 3156,4967.94 3174,4967.94 3170,4976.34 3160,4976.34
  region net RX5: 3527.3,4022.06 3545.3,4022.06 3541.3,4013.66 3531.3,4013.66
  region net TX5: 3548.03,4060.17 3540.46,4076.5 3549.63,4076.7 3554.1,4067.03
  region net SCL3: 3202.06,4821 3202.06,4839 3193.66,4835 3193.66,4825
  region net SDA3: 3200.75,4913.02 3188.02,4925.75 3184.91,4916.98 3191.98,4909.91
  region net RX5: 3072.06,4071 3072.06,4089 3063.66,4085 3063.66,4075
  region net TX5: 3072.06,4116 3072.06,4134 3063.66,4130 3063.66,4120
  region net PC5V: 2755.86,5389.53 2738.88,5395.49 2739.35,5386.42 2749.82,5382.75
  region net PC5V: 2572.94,5401 2572.94,5419 2581.34,5415 2581.34,5405
  region net L4NSS1: 2037.06,2701 2037.06,2719 2028.66,2715 2028.66,2705
  region net D-: 2647.94,5396 2647.94,5414 2656.34,5410 2656.34,5400
  region net D-: 2687.06,5396 2687.06,5414 2678.66,5410 2678.66,5400
  region net 5V: 3124.76,2407.48 3119.25,2457.38 3143.9,2447.5 3146.66,2422.5
  region net 5V: 3131.6,2418.97 3085.11,2400.03 3104.63,2382.69 3129.75,2392.93
  region net BUZSWT: 2178.48,2723.14 2177.81,2776.28 2153.28,2754.4 2153.41,2744.4
  region net TX2: 4283.96,4119.95 4216.04,4119.95 4245,4151.64 4255,4151.64
  region net RX2: 4223.25,3903.47 4217.1,3971.11 4194.55,3940 4195.45,3930
  region net 5V: 4279.95,3756.04 4279.95,3823.96 4300,3802.5 4300,3777.5
  region net TX5: 3750.05,4056.04 3750.05,4123.96 3718.36,4095 3718.36,4085
  region net RX5: 3750.05,3906.04 3750.05,3973.96 3718.36,3945 3718.36,3935
  region net 5V: 3750.05,3756.04 3750.05,3823.96 3718.36,3802.5 3718.36,3777.5
  region net TX6: 3701.78,5651.45 3681.15,5586.75 3659.56,5623.36 3662.98,5634.09
  region net RX6: 3688.89,5492.9 3756.53,5486.75 3730,5514.55 3720,5515.45
  region net E15: 5057.21,5559 5055.99,5612.14 5031.69,5590 5031.92,5580
  region net E14: 5058.11,5459.84 5055.15,5512.91 5031.59,5490 5032.14,5480
  region net E13: 5059.03,5360.72 5054.34,5413.66 5031.53,5390 5032.42,5380
  region net E12: 5397.21,5564 5395.99,5617.14 5371.69,5595 5371.92,5585
  region net E11: 5405.21,5460.49 5389.95,5511.4 5372.19,5484.26 5375.45,5473.38
  region net E10: 5384.67,5396.48 5422.25,5358.9 5389.45,5356.61 5382.38,5363.69
  region net E6: 5057.21,4789 5055.99,4842.14 5031.69,4820 5031.92,4810
  region net E5: 5058.11,4689.84 5055.15,4742.91 5031.59,4720 5032.14,4710
  region net E4: 5059.2,4590.6 5054.19,4643.51 5034.53,4620 5035.47,4610
  region net E9: 5404.37,4784.33 5390.45,4835.62 5371.96,4809.04 5374.98,4797.91
  region net E8: 5410.54,4683.54 5387.34,4731.36 5374.32,4701.39 5378.94,4691.87
  region net E7: 5416.64,4583.99 5385.46,4627.03 5377.99,4595.06 5383.93,4586.86
  region net 5V: 3478.8,3190.03 3433.8,3190.03 3443.8,3211.03 3468.8,3211.03
  region net 5V: 3336.46,3147.7 3336.46,3192.7 3315.46,3182.7 3315.46,3157.7
  region net 5V: 3336.46,3147.7 3336.46,3192.7 3315.46,3176.2 3315.46,3164.2
  region net C13: 3283.09,3688.62 3242.9,3707.24 3266.85,3718.93 3276.52,3714.45
  region net TX2: 3352.94,4109.68 3384.26,4078.36 3386.75,4105.1 3379.68,4112.17
  region net RX2: 3284.13,4076.85 3247.79,4051.53 3273.61,4044.32 3281.94,4050.13
  region net TNSS: 3377.04,4160.8 3332.75,4160.56 3350,4139.98 3360,4140.04
  region net TSCK: 3235.38,4157.96 3235.14,4202.25 3214.56,4185 3214.62,4175
  region net TMISO: 3377.02,4260.78 3332.73,4260.58 3349.97,4239.99 3359.97,4240.03
  region net TMOSI: 3235.38,4257.96 3235.14,4302.25 3214.56,4285 3214.62,4275
  region net C4: 3374.32,4358.06 3374.32,4402.36 3394.99,4385.21 3394.99,4375.21
  region net E7: 3374.33,4602.35 3374.32,4558.06 3394.99,4575.2 3394.99,4585.2
  region net E8: 3282.16,4591.28 3240.38,4605.98 3262.9,4619.97 3273.36,4616.29
  region net E9: 3374.33,4702.35 3374.32,4658.06 3394.99,4675.2 3394.99,4685.2
  region net E10: 3283.75,4685.98 3245.45,4708.22 3270.5,4717.57 3279.45,4712.38
  region net E11: 3374.44,4802.25 3374.2,4757.96 3394.96,4775 3395.02,4785
  region net E12: 3253.1,4809.69 3284.25,4778.2 3286.89,4804.93 3279.85,4812.03
  region net E13: 3374.44,4902.25 3374.2,4857.96 3394.96,4875 3395.02,4885
  region net E14: 3283.95,4875.56 3255.76,4909.72 3282.6,4909.67 3288.99,4901.92
  region net E15: 3374.44,5002.25 3374.2,4957.96 3394.96,4975 3395.02,4985
  region net SCL1: 1974.32,3558.06 1974.32,3602.36 1994.99,3585.21 1994.99,3575.21
  region net SDA1: 1884.15,3583.35 1848,3608.95 1873.88,3615.95 1882.16,3610.09
  region net RX5: 1974.32,4102.35 1974.32,4058.06 1994.99,4075.2 1994.99,4085.2
  region net RX4: 1974.32,4258.06 1974.32,4302.36 1994.99,4285.21 1994.99,4275.21
  region net TX5: 1884.31,4279.46 1850.36,4251.02 1876.76,4246.17 1884.45,4252.62
  region net TX4: 1876.94,4399.74 1832.64,4399.74 1849.79,4409.79 1859.79,4409.79
  region net SDA3: 1983.09,4688.62 1942.9,4707.24 1966.85,4718.93 1976.52,4714.45
  region net SCL3: 1882.73,4689.77 1860.78,4651.3 1887.14,4655.79 1892.28,4664.79
  region net RX6: 1980.32,4765.38 1966.31,4807.4 1991.16,4798.23 1994.69,4787.62
  region net TX6: 1883.75,4885.98 1845.44,4908.22 1870.5,4917.57 1879.45,4912.38
  region net C13: 5056.59,4049.54 5056.59,4102.69 5031.79,4081.11 5031.79,4071.11
  region net E3: 5058.11,3949.84 5055.15,4002.91 5031.59,3980 5032.14,3970
  region net E2: 5056.87,3906.08 5056.31,3852.93 5031.74,3874.77 5031.85,3884.77
  region net TX1: 2445.05,3891.04 2445.05,3958.96 2413.36,3931 2413.36,3919
  region net RX1: 2445.05,3741.04 2445.05,3808.96 2413.36,3780 2413.36,3770
  region net 5V: 1824.53,1992.85 1824.53,2037.15 1840,2027.5 1840,2002.5
  region net 5V: 1785.47,1992.85 1785.47,2037.15 1775,2027.5 1775,2002.5
  region net 3V3: 1927.15,2034.53 1882.85,2034.53 1900,2055.2 1910,2055.2
  region net M5V: 2103.15,1985.53 2134.47,2016.85 2136.96,1990.11 2129.89,1983.04
  region net M3V3: 2103.15,1885.53 2134.47,1916.85 2136.96,1890.11 2129.89,1883.04
  region net L4NSS1: 1830.65,3229.62 1816.3,3187.72 1841.23,3196.7 1844.83,3207.24
  region net G: 1884.16,3094.08 1928.36,3096.94 1912.6,3075.21 1902.6,3074.56
  region net C0: 2227.15,3095.47 2182.85,3095.47 2200,3074.8 2210,3074.8
  region net C0: 2231.94,3102.9 2213.64,3143.24 2239.4,3136.47 2243.82,3126.74
  region net C1: 2175.53,3216.85 2206.85,3185.53 2180.11,3183.04 2173.04,3190.11
  region net C1: 2227.15,3234.53 2182.85,3234.53 2200,3255.2 2210,3255.2

## Silkscreen, mask and mechanical layers (free items; w line width, h text height)
Top Overlay:
  text "E15" at 4987.5,5570 h45 r90
  text "E12" at 5317.5,5570 h45 r90
  text "C6" at 3597.5,5565 h45 r90
  text "E11" at 5317.5,5475 h45 r90
  text "E14" at 4987.5,5470 h45 r90
  text "C7" at 3607.5,5420 h45 r90
  text "E10" at 5317.5,5365 h45 r90
  text "E13" at 4987.5,5360 h45 r90
  text "5V" at 3602.5,5270 h45 r90
  text "C9" at 3997.5,5245 h45 r90
  text "G" at 5272.5,5195 h45 r270
  text "B14" at 4475,5192.5 h45
  text "G" at 4942.5,5185 h45 r270
  text "A8" at 3997.5,5135 h45 r90
  text "G" at 3562.5,5130 h45 r270
  text "B13" at 4475,5092.5 h45
  text "12V" at 4987.5,5060 h45 r90
  text "12V" at 5317.5,5060 h45 r90
  text "5V" at 3997.5,5025 h45 r90
  text "B0" at 4490,4992.5 h45
  text "G" at 3947.5,4940 h45 r270
  text "B1" at 4500,4897.5 h45
  text "E9" at 5342.5,4833.07 h45 r90
  text "E6" at 4997.5,4820 h45 r90
  text "C10" at 3642.5,4785 h45 r90
  text "D12" at 4475,4762.5 h45
  text "B9" at 4387.5,4740 h45 r270
  text "E8" at 5342.5,4738.07 h45 r90
  text "E5" at 4997.5,4725 h45 r90
  text "D13" at 4475,4662.5 h45
  text "B8" at 4387.5,4645 h45 r270
  text "C11" at 3647.5,4640 h45 r90
  text "E7" at 5342.5,4633.07 h45 r90
  text "E4" at 4997.5,4620 h45 r90
  text "D14" at 4475,4552.5 h45
  text "5V" at 4387.5,4545 h45 r270
  text "5V" at 3637.5,4500 h45 r90
  text "D15" at 4475,4457.5 h45
  text "G" at 5307.5,4458.07 h45 r270
  text "G" at 4962.5,4445 h45 r270
  text "G" at 4432.5,4425 h45 r90
  text "G" at 4815,4412.5 h45 r180
  text "+5V" at 4665,4367.5 h45
  text "G" at 3597.5,4350 h45 r270
  text "12V" at 5352.5,4323.07 h45 r90
  text "A2" at 4502.5,4065 h45 r90
  text "C12" at 3637.5,4055 h45 r90
  text "C13" at 4972.5,4035 h45 r90
  text "E3" at 4972.5,3940 h45 r90
  text "A3" at 4507.5,3925 h45 r90
  text "D2" at 3647.5,3910 h45 r90
  text "E2" at 4972.5,3845 h45 r90
  text "5V" at 4507.5,3770 h45 r90
  text "5V" at 3652.5,3760 h45 r90
  text "G" at 4927.5,3670 h45 r270
  text "G" at 3612.5,3620 h45 r270
  text "G" at 4457.5,3610 h45 r270
  text "+" at 5298.28,3573.28 h80 r135
  text "12V" at 4972.5,3535 h45 r90
  text "G" at 5405,2682.5 h45 r180
  text "AIN" at 5280,2637.5 h45
  text "B7" at 2933.41,2629.29 h45 r211
  text "B6" at 2962.5,2505 h45 r90
  text "5V" at 2967.5,2390 h45 r90
  text "G" at 2927.5,2295 h45 r270

## Text inside footprints (layer, text, board x,y; h text height)
L4: Bottom Overlay "A3" at 1780,3031 h37 r180; Bottom Overlay "A4" at 1778,3076 h37 r180; Bottom Overlay "A7" at 1979,3031 h37 r180; Bottom Overlay "C4" at 1967.31,3073.83 h37 r208; Bottom Overlay "C5" at 2075,3031 h37 r180; Bottom Overlay "B0" at 2081,3076 h37 r180; Bottom Overlay "B1" at 2183,3031 h37 r180; Bottom Overlay "B2" at 2180,3076 h37 r180; Bottom Overlay "B12" at 2373,3031 h37 r180; Bottom Overlay "B13" at 2373,3076 h37 r180; Bottom Overlay "B14" at 2471,3031 h37 r180; Bottom Overlay "B15" at 2473,3076 h37 r180; Bottom Overlay "C6" at 2578,3031 h37 r180; Bottom Overlay "C7" at 2593.52,3047.42 h37 r57; Bottom Overlay "C8" at 2677,3031 h37 r180; Bottom Overlay "C9" at 2678,3076 h37 r180; Bottom Overlay "A8" at 2771,3031 h37 r180; Bottom Overlay "A10" at 2867,3031 h37 r180; Bottom Overlay "A11" at 2873,3076 h37 r180; Bottom Overlay "A12" at 2963,3031 h37 r180; Bottom Overlay "A13" at 2961,3076 h37 r180; Bottom Overlay "5V" at 1835,2097 h37; Bottom Overlay "GND" at 1855,2052 h37; Bottom Overlay "3.3" at 1940,2097 h37; Bottom Overlay "A2" at 1936,2052 h37; Bottom Overlay "A1" at 2036,2097 h37; Bottom Overlay "A0" at 2037,2052 h37; Bottom Overlay "C3" at 2135,2097 h37; Bottom Overlay "C2" at 2136,2052 h37; Bottom Overlay "C1" at 2232,2097 h37; Bottom Overlay "C0" at 2236,2052 h37; Bottom Overlay "RST" at 2337,2097 h37; Bottom Overlay "C15" at 2344,2052 h37; Bottom Overlay "C14" at 2450,2097 h37; Bottom Overlay "C13" at 2452,2052 h37; Bottom Overlay "BAT" at 2551,2097 h37; Bottom Overlay "B8" at 2536,2052 h37; Bottom Overlay "B8" at 2632,2097 h37; Bottom Overlay "B7" at 2632,2052 h37; Bottom Overlay "B6" at 2734,2097 h37; Bottom Overlay "B5" at 2734,2052 h37; Bottom Overlay "B4" at 2835,2097 h37; Bottom Overlay "B3" at 2834,2052 h37; Bottom Overlay "D2" at 2934,2097 h37; Bottom Overlay "C12" at 2945,2052 h37; Bottom Overlay "C11" at 3049,2097 h37; Bottom Overlay "C10" at 3051,2052 h37; Bottom Overlay "A15" at 3152,2097 h37; Bottom Overlay "A14" at 3152,2052 h37; Bottom Overlay "GND" at 3061,3053 h37 r180; Bottom Overlay "B10" at 2267,3031 h37 r180; Bottom Overlay "A9" at 2769,3076 h37 r180; Bottom Overlay "A6" at 1871,3076 h37 r180; Bottom Overlay "A5" at 1871,3031 h37 r180; Bottom Overlay "B11" at 2269.63,3078.37 h37 r180
U5: Top Overlay "TTL" at 4320,3303.1 h43.81; Top Overlay "+5V" at 4373.46,3194.5 h57.42; Top Overlay "G" at 4375,3151.69 h56.96 r180; Top Overlay "TXD" at 4373.46,3004.5 h57.42; Top Overlay "RXD" at 4373.46,2904.5 h57.42; Top Overlay "G" at 4905,3011.69 h56.96 r180; Top Overlay "RXD" at 4813.46,3154.5 h57.42; Top Overlay "TXD" at 4813.46,3054.5 h57.42; Top Overlay "RS232" at 4790,3276.29 h57.42
U27: Top Overlay "5V" at 2282.05,5531.05 h35; Top Overlay "5V" at 2152.26,5530.63 h35; Top Overlay "GND" at 2152.26,5340.63 h35; Top Overlay "GND" at 2287.26,5340.63 h35; Top Overlay "3V3" at 2152.26,5435.63 h35; Top Overlay "3V3" at 2282.26,5435.63 h35; Top Overlay "PE1" at 2172.26,3435.63 h35; Top Overlay "PE0" at 2302.26,3435.63 h35; Top Overlay "PB9" at 2167.26,3535.63 h35; Top Overlay "PB8" at 2302.26,3535.63 h35; Top Overlay "PB7" at 2172.26,3635.63 h35; Top Overlay "PB6" at 2297.26,3635.63 h35; Top Overlay "PB5" at 2172.26,3735.63 h35; Top Overlay "PB3" at 2292.26,3735.63 h35; Top Overlay "PD7" at 2172.05,3846.05 h35; Top Overlay "PD6" at 2292.05,3846.05 h35; Top Overlay "PD5" at 2157.05,3936.05 h35; Top Overlay "PD4" at 2287.05,3936.05 h35; Top Overlay "PD3" at 2152.05,4041.05 h35; Top Overlay "PD2" at 2282.05,4041.05 h35; Top Overlay "PD1" at 2157.05,4145.79 h35; Top Overlay "PD0" at 2277.05,4145.79 h35; Top Overlay "PC12" at 2117.05,4241.05 h35; Top Overlay "PC11" at 2272.05,4241.05 h35; Top Overlay "PC10" at 2117.05,4336.05 h35; Top Overlay "PA15" at 2267.05,4336.05 h35; Top Overlay "PA12" at 2127.05,4436.05 h35; Top Overlay "PA11" at 2282.26,4435.63 h35; Top Overlay "PA10(RX1)" at 2027.26,4505.63 h35; Top Overlay "PA9(TX1)" at 2167.26,4560.63 h35; Top Overlay "PA8" at 2142.05,4646.05 h35; Top Overlay "PC9" at 2282.05,4646.05 h35; Top Overlay "PC8" at 2145.67,4734.67 h35; Top Overlay "PC7" at 2284.73,4735.01 h35; Top Overlay "PC6" at 2117.26,4830.63 h35; Top Overlay "PD15" at 2262.05,4831.05 h35; Top Overlay "PD14" at 2117.26,4930.63 h35; Top Overlay "PD13" at 2272.05,4931.05 h35; Top Overlay "PD11" at 2277.26,5045.63 h35; Top Overlay "PD12" at 2117.05,5046.05 h35; Top Overlay "PD9" at 2282.26,5140.63 h35; Top Overlay "PD10" at 2117.26,5140.63 h35; Top Overlay "PB15" at 2257.05,5241.05 h35; Top Overlay "PD8" at 2122.05,5241.05 h35; Top Overlay "3V3" at 2902.05,5531.05 h35; Top Overlay "3V3" at 3022.05,5531.05 h35; Top Overlay "GND" at 3022.05,5431.05 h35; Top Overlay "GND" at 2902.05,5431.05 h35; Top Overlay "GND" at 2902.05,5336.05 h35; Top Overlay "GND" at 3027.05,5336.05 h35; Top Overlay "VREF+" at 3052.26,5235.63 h35; Top Overlay "VDDA" at 2882.26,5235.63 h35; Top Overlay "PB14" at 2882.26,5135.63 h35; Top Overlay "PB13" at 3047.26,5135.63 h35; Top Overlay "PB11" at 3052.26,5030.63 h35; Top Overlay "PB12" at 2887.26,5030.63 h35; Top Overlay "PB10" at 2887.05,4941.05 h35; Top Overlay "PE15" at 3052.26,4940.63 h35; Top Overlay "PE13" at 3052.26,4840.63 h35; Top Overlay "PE14" at 2887.05,4841.05 h35; Top Overlay "PE12" at 2892.05,4736.05 h35; Top Overlay "PE11" at 3052.26,4735.63 h35; Top Overlay "PE9" at 3062.26,4640.63 h35; Top Overlay "PE10" at 2897.05,4641.05 h35; Top Overlay "PE8" at 2917.26,4535.63 h35; Top Overlay "PE7" at 3062.26,4535.63 h35; Top Overlay "PB0" at 3062.26,4440.63 h35; Top Overlay "PB1" at 2917.26,4440.63 h35; Top Overlay "PC5" at 2912.05,4341.05 h35; Top Overlay "PC4" at 3062.26,4340.63 h35; Top Overlay "PA7" at 2917.26,4235.63 h35; Top Overlay "PA5" at 2917.26,4135.63 h35; Top Overlay "PA4" at 3062.26,4135.63 h35; Top Overlay "PA6" at 3062.26,4235.63 h35; Top Overlay "PA3" at 2917.26,4040.63 h35; Top Overlay "PA1" at 2922.05,3946.05 h35; Top Overlay "PA2" at 3062.26,4040.63 h35; Top Overlay "PA0" at 3062.26,3945.63 h35; Top Overlay "PC2" at 3062.26,3840.63 h35; Top Overlay "PC3" at 2912.05,3841.05 h35; Top Overlay "PC1" at 2927.26,3745.63 h35; Top Overlay "PC0" at 3062.26,3745.63 h35; Top Overlay "PE6" at 3062.26,3650.63 h35; Top Overlay "PC13" at 2892.26,3650.63 h35; Top Overlay "PE5" at 2917.05,3541.05 h35; Top Overlay "PE4" at 3062.26,3540.63 h35; Top Overlay "PE2" at 3062.26,3435.63 h35; Top Overlay "PE3" at 2912.05,3436.05 h35